# EAGLE board SensorBoard (EAGLE 8.2.0)

Size 58.42 x 48.26 mm. Coordinates in mm from the lower left corner, seen from the top.
Outline: 0,48.26 58.42,48.26 58.42,0 0,0 0,48.26
Copper layers (1*16): Top 0.035mm / dielectric 1.5mm / Bottom 0.035mm
Design rules "default *": minimum track width 44mil, minimum drill 20mil, track to track 20mil, track to pad 20mil, pad to pad 20mil, via to via 20mil, smd to smd 0mil, copper to edge 40mil, drill to drill 6mil, minimum pad ring 10mil, minimum via ring 8mil, stop-mask expansion 4mil, vias tented up to drill 0mil, thermal gap 10mil

## Footprints (pad centres in the part's own frame; a part is rotated, then mirrored left to right if it is on the bottom)
1X02 = drill 1.016 long: 1 -1.27,0; 2 1.27,0
1X03 = drill 1.016 long: 1 -2.54,0; 2 0,0; 3 2.54,0
1X06 = drill 1.016 long: 1 -6.35,0; 2 -3.81,0; 3 -1.27,0; 4 1.27,0; 5 3.81,0; 6 6.35,0
1X08 = drill 1.016 long: 1 -8.89,0; 2 -6.35,0; 3 -3.81,0; 4 -1.27,0; 5 1.27,0; 6 3.81,0; 7 6.35,0; 8 8.89,0
W237-132 = drill 1.194 long: 1 -2.54,-0.635; 2 2.54,-0.635

## Placement (x,y rotation side)
JP1  [1X02]  3.81,40.64 90 top
JP2  [1X03]  22.86,39.37 270 top
JP3  [1X03]  22.86,29.21 270 top
JP4  [1X02]  7.62,31.75 0 top
JP5  [1X06]  54.61,19.05 90 top
JP6  [1X02]  12.7,31.75 0 top
JP7  [1X08]  29.21,12.7 270 top
JP9  [1X03]  43.18,39.37 270 top
JP10  [1X03]  43.18,29.21 270 top
X1  [W237-132]  7.62,16.51 270 top
X2  [W237-132]  41.91,6.35 0 top

## Library data of the parts
JP1-JP7 JP9 JP10 = pinhead
X1 X2 = con-wago-508; OC_FARNELL: unknown; OC_NEWARK: unknown

## Nets
COMMON-GND: JP2.2 JP3.2 JP7.1 JP7.2 JP7.3 JP7.4 JP7.5 JP7.6 JP7.7 JP7.8 JP9.2 JP10.2 X1.2 X2.2
N$1: JP1.1 JP1.2 JP4.1 X1.1
N$2: JP4.2 JP6.1
SENSOR-5V+: JP2.3 JP3.3 JP5.1 JP5.2 JP5.3 JP5.4 JP5.5 JP5.6 JP9.3 JP10.3 X2.1
V-IN: JP2.1 JP3.1 JP6.2 JP9.1 JP10.1

## Tracks (layer width: path | path; a pad name or v marks a point on that pad's centre or on a via)
COMMON-GND  (47 unrouted)
N$1  (10 unrouted)
N$2  (3 unrouted)
SENSOR-5V+  (36 unrouted)
V-IN  (17 unrouted)